# EAGLE board tapecleaner (EAGLE 7.2.0)
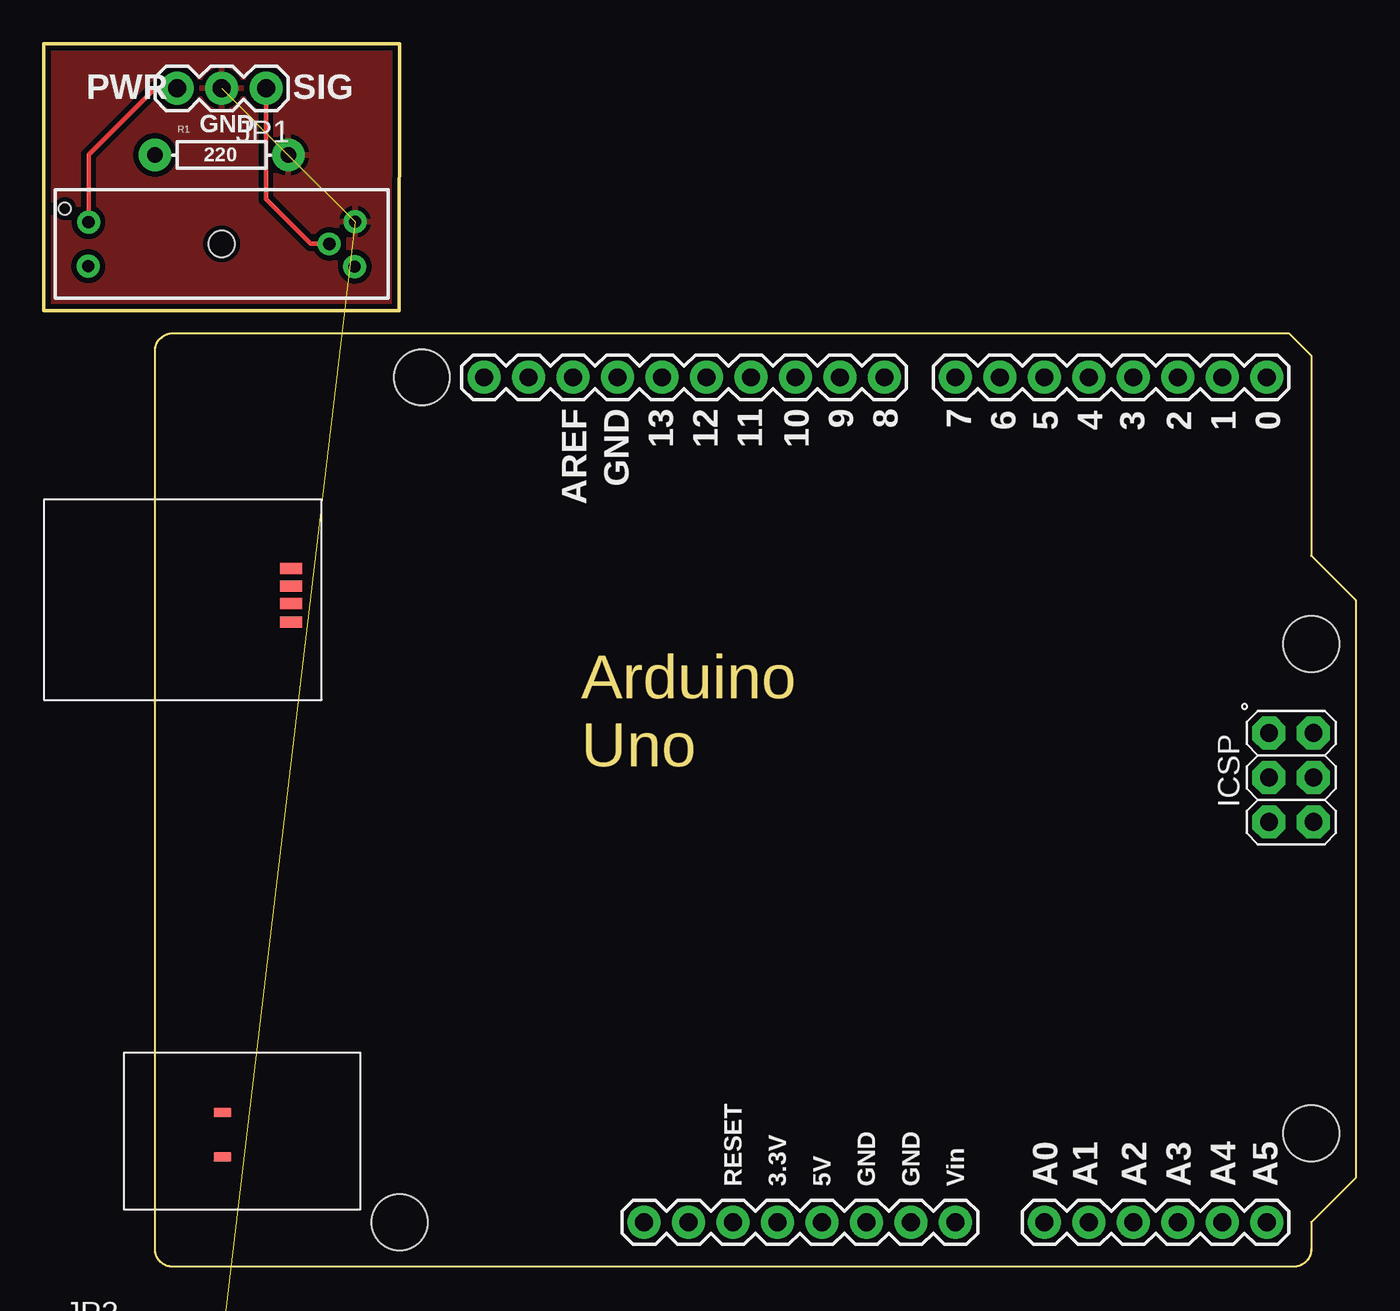
[diagram p0: board, top side]
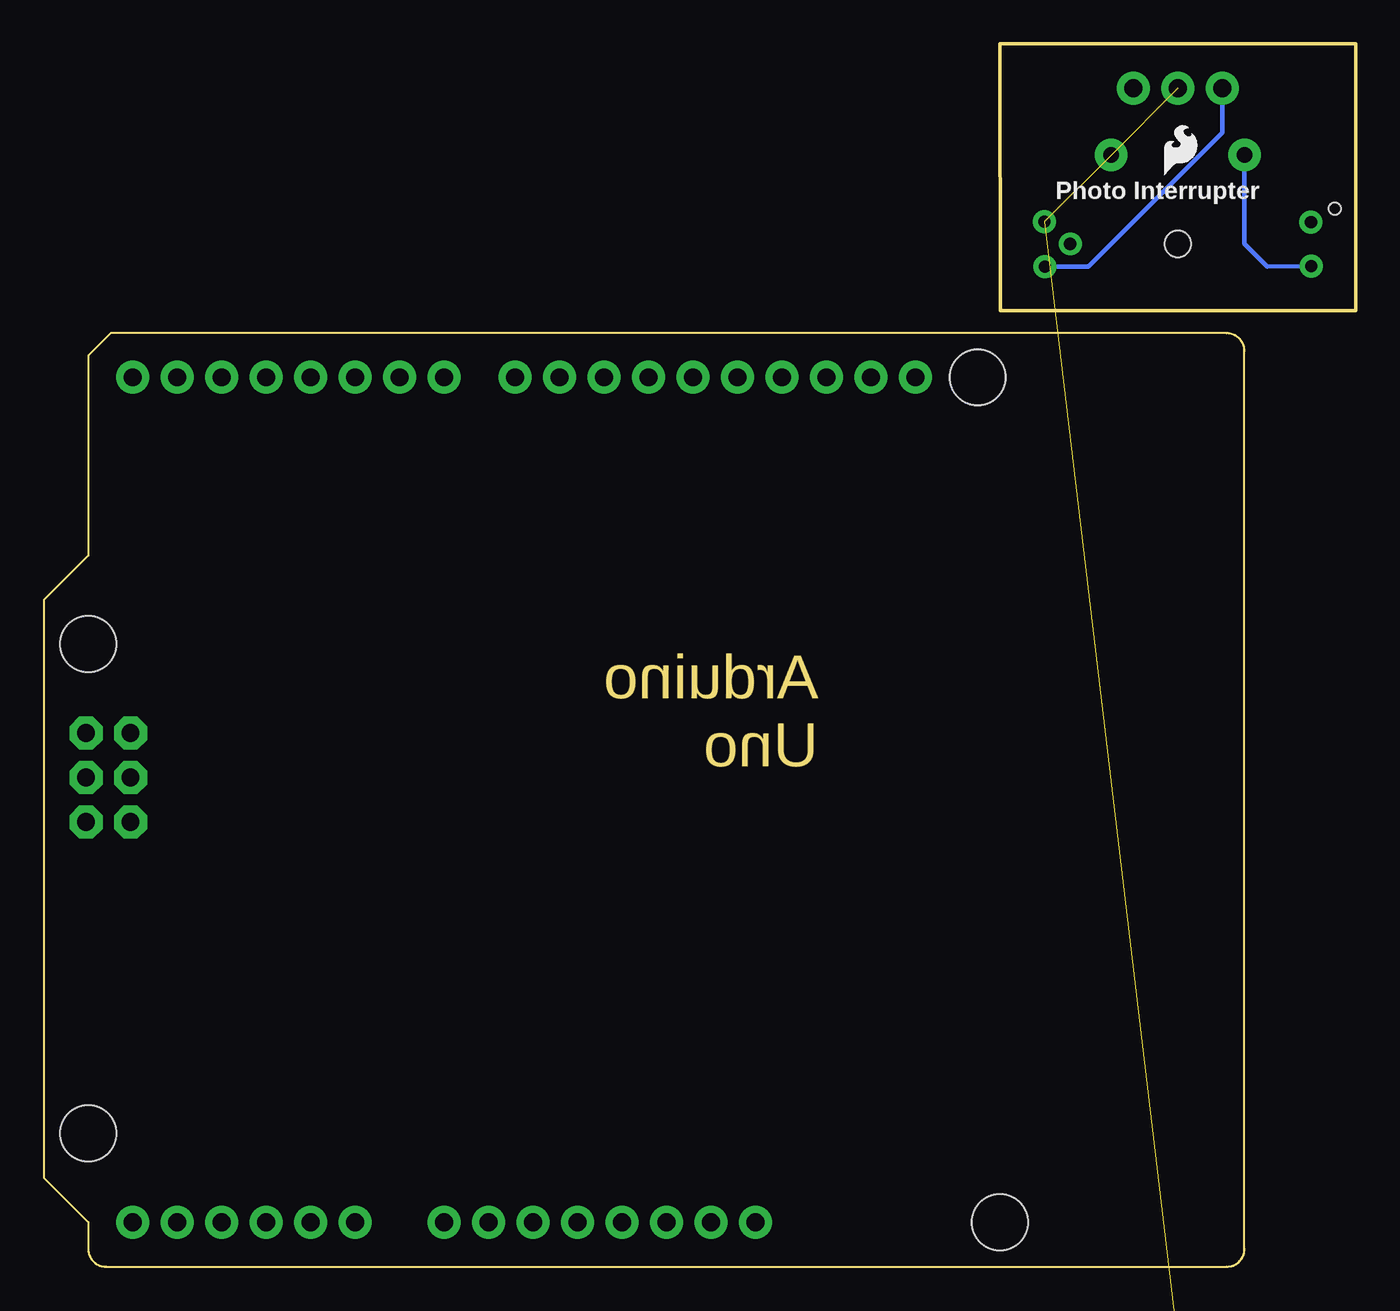
[diagram p1: board, bottom side, seen from below]

Size 20.32 x 15.24 mm. Coordinates in mm from the lower left corner, seen from the top.
Outline: 0,0 20.3,0 20.32,15.24 0,15.24 0,0
Copper layers (1*16): Top 0.0356mm / dielectric 1.5011mm / Bottom 0.0356mm
Design rules "default": minimum track width 8mil, minimum drill 20mil, track to track 8mil, track to pad 8mil, pad to pad 8mil, via to via 8mil, smd to smd 8mil, copper to edge 10mil, drill to drill 8mil, minimum pad ring 12mil, minimum via ring 10mil, stop-mask expansion 4mil, vias tented up to drill 20mil, thermal gap 10mil

## Footprints (pad centres in the part's own frame; a part is rotated, then mirrored left to right if it is on the bottom)
1X03 = drill 1.016 pad 1.88: 1 0,0; 2 2.54,0; 3 5.08,0
ARDUINO_UNO = drill 1.016 pad 1.88: 0 63.5,50.8; 1 60.96,50.8; 2 58.42,50.8; 3 55.88,50.8; 3.3V 35.56,2.54; 4 53.34,50.8; 5 50.8,50.8; 5V 38.1,2.54; 6 48.26,50.8; 7 45.72,50.8; 8 41.656,50.8; 9 39.116,50.8; 10 36.576,50.8; 11 34.036,50.8; 12 31.496,50.8; 13 28.956,50.8; A0 50.8,2.54; A1 53.34,2.54; A2 55.88,2.54; A3 58.42,2.54; A4 60.96,2.54; A5 63.5,2.54; AREF 23.876,50.8; GND 26.416,50.8; GND. 43.18,2.54; GND.. 40.64,2.54; I/OREF 30.48,2.54; N/C 27.94,2.54; RESET 33.02,2.54; SCL 18.796,50.8; SDA 21.336,50.8; VIN 45.72,2.54 | drill 1.016 pad 1.88 octagon: +5V 66.167,30.48; GND_ 66.167,25.4; MISO 63.627,30.48; MOSI 66.167,27.94; RESET. 63.627,25.4; SCK 63.627,27.94 | smd 1.016 x 0.508: <PWR>+V 3.861,8.814; <PWR>-V 3.861,6.274 | smd 1.27 x 0.635: <USB>+V 7.772,39.878; <USB>D+ 7.772,38.887; <USB>D- 7.772,37.871; <USB>GND 7.772,36.83 | hole 3.2: 66.04,7.62; 66.04,35.56; 15.24,50.8; 13.97,2.54
AXIAL-0.3 = drill 0.9 pad 1.88: P$1 -3.81,0; P$2 3.81,0
GP1A57HR = drill 0.7: 1 -7.6,1.24; 2 -7.62,-1.27; 3 7.6,-1.3; 4 6.15,0; 5 7.62,1.27 | hole 1.5: 0,0 | hole 0.7: -8.95,2

## Placement (x,y rotation side)
JP1  [1X03]  12.7,12.7 180 top
JP2  [1X03]  2.54,-59.69 0 top  (outside the outline)
PCB1  ARDUINO_UNO  [ARDUINO_UNO]  6.35,-54.61 0 top  (outside the outline)
R1  220  [AXIAL-0.3]  10.16,8.89 0 top
R2  220  [AXIAL-0.3]  5.08,-69.85 0 top  (outside the outline)
U1  GP1A57HR  [GP1A57HR]  10.16,3.81 0 top
U2  LOGO-SFESK  [SFE-LOGO-FLAME]  10.92,7.75 0 bottom
U3  GP1A57HR  [GP1A57HR]  10.16,-64.77 0 top  (outside the outline)

## Library data of the parts
JP1 JP2 R1 R2 U1-U3 = SparkFun
PCB1 = E14_Arduino_revB

## Nets
GND: JP1.2 R1.P$2 R2.P$2 U1.5
N$2: R1.P$1 U1.2
N$3: JP2.2
N$4: R2.P$1
SIG: JP1.1 U1.4
VCC: JP1.3 U1.1 U1.3

## Tracks (layer width: path | path; a pad name or v marks a point on that pad's centre or on a via)
GND  (3 unrouted)
  pour Top (isolate 0.305): 0,0 20.32,0 20.32,15.24 0,15.24
N$2
  Bottom 0.254: U1.2 5.05,2.51 6.35,3.81 R1.P$1
SIG
  Top 0.254: U1.4 15.24,3.81 12.7,6.35 JP1.1
VCC
  Top 0.254: JP1.3 6.35,12.7 2.56,8.91 U1.1
  Bottom 0.254: U1.3 15.27,2.51 7.62,10.16 JP1.3

## Text on the board
tPlace: PWR | SIG | GND
bPlace: Photo Interrupter